# EAGLE board roulette wheel (EAGLE 9.6.0)
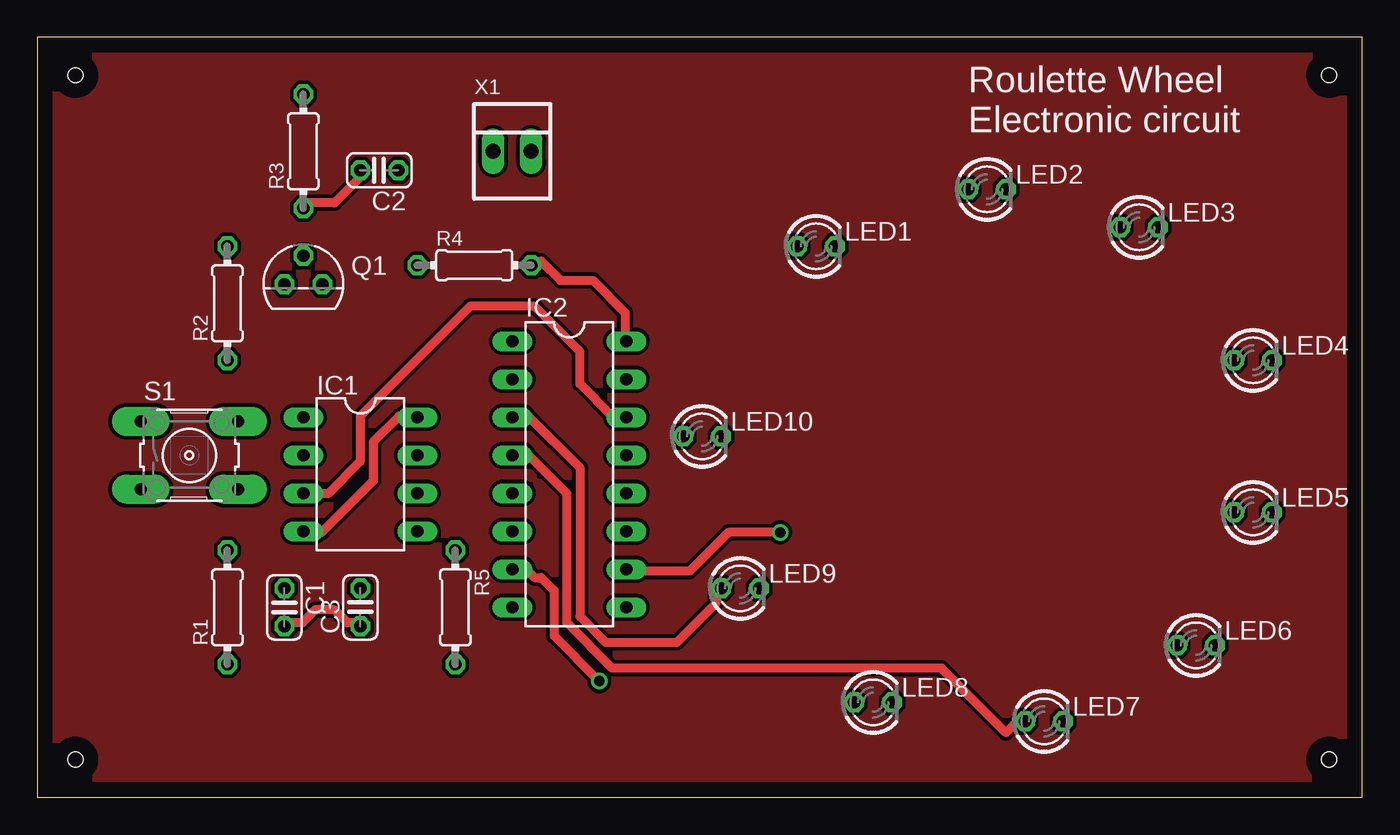
[diagram p0: board, top side]
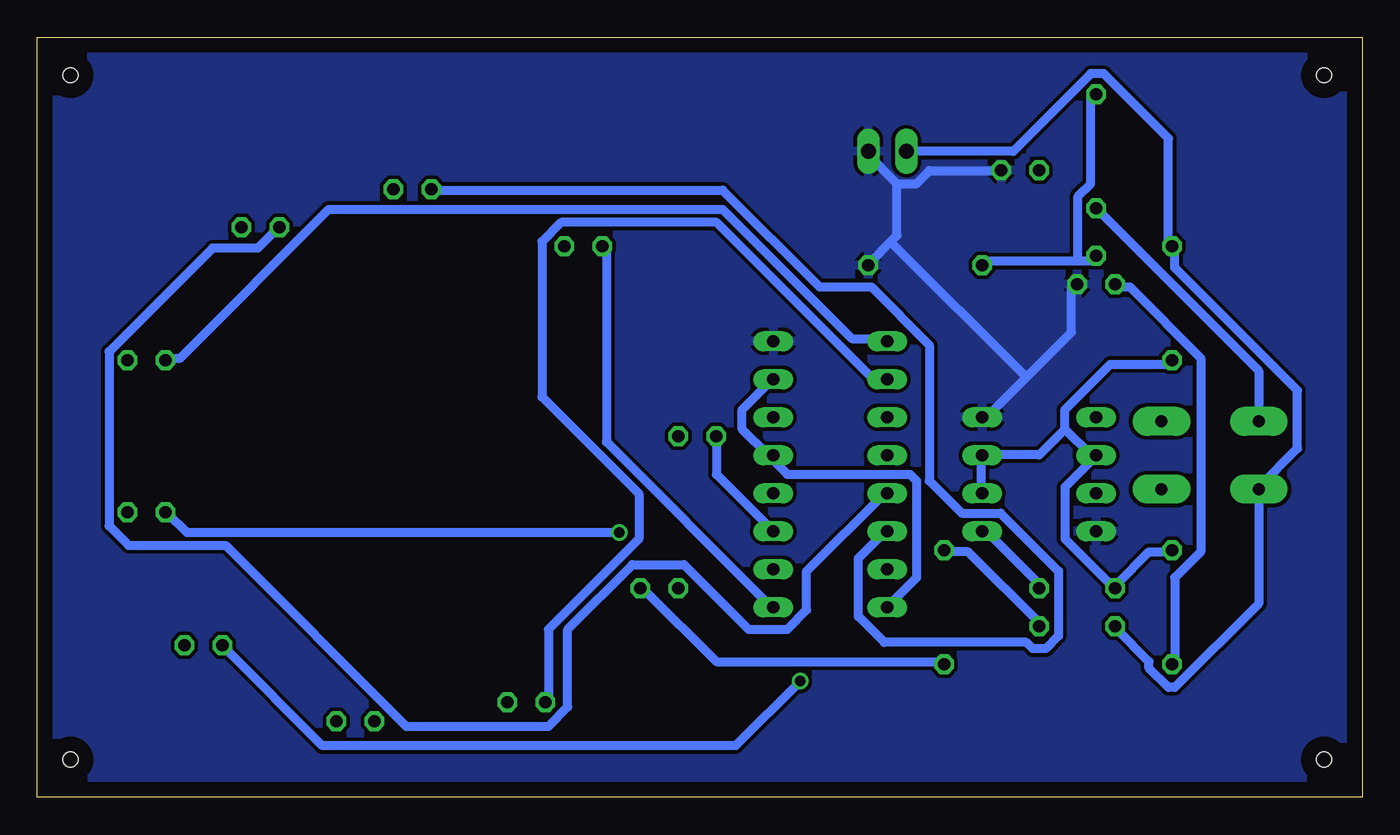
[diagram p1: board, bottom side, seen from below]

Size 88.57 x 50.79 mm. Coordinates in mm from the lower left corner, seen from the top.
Outline: 0,0 88.57,0 88.57,50.79 0,50.79 0,0
Copper layers (1*16): Top 0.035mm / dielectric 1.5mm / Bottom 0.035mm
Design rules "default": minimum track width 6mil, minimum drill 0.35mm, track to track 6mil, track to pad 6mil, pad to pad 6mil, via to via 6mil, smd to smd 6mil, copper to edge 40mil, drill to drill 6mil, minimum pad ring 10mil, minimum via ring 8mil, stop-mask expansion 4mil, vias tented up to drill 0mil, thermal gap 10mil
Net classes: 0 default: width 0.61 mm, drill 0.686 mm, clearance 0.254 mm
Holes 1 mm at 2.54,2.54 2.54,48.26 86.36,2.54 86.36,48.26

## Footprints (pad centres in the part's own frame; a part is rotated, then mirrored left to right if it is on the bottom)
C025-024X044 = drill 0.813 octagon: 1 -1.27,0; 2 1.27,0
DIL-08 = drill 0.813 long: 1 -3.81,-3.81; 2 -1.27,-3.81; 3 1.27,-3.81; 4 3.81,-3.81; 5 3.81,3.81; 6 1.27,3.81; 7 -1.27,3.81; 8 -3.81,3.81
DIL16 = drill 0.813 long: 1 -8.89,-3.81; 2 -6.35,-3.81; 3 -3.81,-3.81; 4 -1.27,-3.81; 5 1.27,-3.81; 6 3.81,-3.81; 7 6.35,-3.81; 8 8.89,-3.81; 9 8.89,3.81; 10 6.35,3.81; 11 3.81,3.81; 12 1.27,3.81; 13 -1.27,3.81; 14 -3.81,3.81; 15 -6.35,3.81; 16 -8.89,3.81
LED3MM = drill 0.813 octagon: A -1.27,0; K 1.27,0
TO92 = drill 0.813 octagon: 1 1.27,0; 2 0,1.905; 3 -1.27,0
0204/7 = drill 0.813 octagon: 1 -3.81,0; 2 3.81,0
B3F-10XX = drill 0.8 pad 1.93 long: 1 -3.251,2.261; 2 3.251,2.261; 3 -3.251,-2.261; 4 3.251,-2.261
22-23-2021 = drill 1 long: 1 -1.27,0; 2 1.27,0

## Placement (x,y rotation side)
C1  [C025-024X044]  16.51,12.7 270 top
C2  [C025-024X044]  22.86,41.91 180 top
C3  [C025-024X044]  21.59,12.7 90 top
IC1  NE555  [DIL-08]  21.59,21.59 270 top
IC2  4017N  [DIL16]  35.56,21.59 270 top
LED1  [LED3MM]  52.07,36.83 0 top
LED2  [LED3MM]  63.5,40.64 0 top
LED3  [LED3MM]  73.66,38.1 0 top
LED4  [LED3MM]  81.28,29.21 0 top
LED5  [LED3MM]  81.28,19.05 0 top
LED6  [LED3MM]  77.47,10.16 0 top
LED7  [LED3MM]  67.31,5.08 0 top
LED8  [LED3MM]  55.88,6.35 0 top
LED9  [LED3MM]  46.99,13.97 0 top
LED10  [LED3MM]  44.45,24.13 0 top
Q1  BC557  [TO92]  17.78,34.29 0 top
R1  [0204/7]  12.7,12.7 90 top
R2  [0204/7]  12.7,33.02 90 top
R3  [0204/7]  17.78,43.18 90 top
R4  [0204/7]  29.21,35.56 0 top
R5  [0204/7]  27.94,12.7 270 top
S1  [B3F-10XX]  10.16,22.86 0 top
X1  22-23-2021  [22-23-2021]  31.75,43.18 0 top

## Library data of the parts
C1-C3 = rcl; SPICEPREFIX: C
IC1 = st-microelectronics; MF: Arrow Electronics; MPN: NE555N; OC_FARNELL: 1467742; OC_NEWARK: 89K1486
IC2 = 40xx
LED1-LED10 = led
Q1 = transistor-pnp
R1-R5 = rcl; SPICEPREFIX: R
S1 = switch-omron; MPN: B3F-1000; OC_FARNELL: 176432; OC_NEWARK: 36M3542
X1 = con-molex; MF: MOLEX; MPN: 22-23-2021; OC_FARNELL: 1462926; OC_NEWARK: 25C3832

## Nets
N$1: C1.1 IC1.2 IC1.6 IC1.7 R1.2 R2.1
N$2: IC1.3 IC2.14
N$4: Q1.3 R1.1
N$5: Q1.2 R3.2 R4.1
N$6: C2.2 R3.1 S1.1
N$7: IC2.9 LED1.A
N$8: LED5.K
N$9: IC2.8 IC2.13 IC2.15
N$10: IC2.6 LED2.A
N$11: IC2.5 LED3.A
N$12: IC2.1 LED4.A
N$13: IC2.10 LED5.A
N$14: IC2.7 LED6.A
N$15: IC2.4 LED7.A
N$16: IC2.2 LED8.A
N$17: IC2.3 LED9.A
N$18: IC2.11 LED10.A
N$19: LED4.K
N$20: LED3.K
N$21: LED2.K
N$22: LED1.K
N$23: LED10.K
N$24: LED9.K R5.2
N$25: LED6.K
N$26: LED7.K
N$27: LED8.K
N$28: C1.2 C3.1 R2.2 R5.1 S1.3 X1.1
N$29: IC1.1
N$30: C3.2 IC1.5
VCC: C2.1 IC1.4 IC1.8 IC2.16 Q1.1 R4.2 X1.2

## Tracks (layer width: path | path; a pad name or v marks a point on that pad's centre or on a via)
GND
  pour Top: 0,50.8 0,0 88.9,0 88.9,50.8
N$1
  Bottom 0.61: R1.2 12.95,16.41 14.25,16.41 16.41,14.25 C1.1 16.84,14.25 19.86,17.27 19.86,20.73 18.14,22.45 IC1.2 18.14,22.89 19.86,24.61 | IC1.6 25.48,20.73 25.48,22.45 IC1.7 25.04,22.89 21.59,22.89 19.86,24.61 | 19.86,24.61 19.86,25.91 16.84,28.93 12.95,28.93 R2.1
N$2
  Top 0.61: IC1.3 18.14,20.3 19.43,20.3 21.59,22.45 21.59,25.48 28.93,32.82 33.25,32.82 36.27,29.79 36.27,27.64 38.43,25.48 39.29,25.48 IC2.14
N$4
  Bottom 0.61: R1.1 12.52,9.07 12.52,14.68 10.79,16.41 10.79,29.36 15.54,34.11 16.41,34.11 Q1.3
N$5
  Bottom 0.61: 19,35.84 18.14,35.84 Q1.2 | 19,35.84 25.04,35.84 R4.1 | 19,35.84 19,40.16 18.14,41.02 18.14,46.63 R3.2
N$6
  Top 0.61: C2.2 21.59,41.45 19.86,39.73 18.14,39.73 R3.1
  Bottom 0.61: S1.1 6.91,28.5 R3.1
N$7
  Bottom 0.61: IC2.9 39.73,12.95 50.52,23.75 50.52,36.7 LED1.A
N$9
  Bottom 0.61: IC2.8 31.52,12.95 29.79,14.68 29.79,21.16 30.23,21.59 38.43,21.59 39.29,22.45 IC2.13 39.73,22.89 41.45,24.61 41.45,25.91 39.73,27.64 IC2.15
N$10
  Bottom 0.61: IC2.6 31.95,17.7 33.68,15.98 33.68,12.09 31.95,10.36 22.45,10.36 22.02,9.93 21.16,9.93 20.3,10.79 20.3,15.11 24.18,19 26.77,19 28.93,21.16 28.93,30.23 32.82,34.11 36.27,34.11 42.75,40.59 62.18,40.59 LED2.A
N$11
  Bottom 0.61: IC2.5 31.95,20.3 37.13,15.11 37.13,12.52 38.43,11.23 41.02,11.23 45.34,15.54 48.79,15.54 53.11,11.23 53.11,6.04 54.41,4.75 63.91,4.75 76,16.84 82.47,16.84 83.77,18.14 83.77,29.79 76.86,36.7 73.84,36.7 72.54,38 LED3.A
N$12
  Bottom 0.61: IC2.1 31.95,30.66 34.11,30.66 42.75,39.29 69.09,39.29 79.02,29.36 79.88,29.36 LED4.A
N$13  (via drill 0.69)
  Top 0.61: v49.66,17.7 46.2,17.7 43.61,15.11 39.73,15.11 IC2.10
  Bottom 0.61: v49.66,17.7 78.59,17.7 79.88,19 LED5.A
N$14  (via drill 0.69)
  Top 0.61: v37.57,7.77 34.54,10.79 34.54,13.82 33.68,14.68 33.25,14.68 32.82,15.11 31.95,15.11 IC2.7
  Bottom 0.61: v37.57,7.77 41.88,3.45 69.52,3.45 76,9.93 LED6.A
N$15
  Top 0.61: IC2.4 31.95,22.89 32.82,22.89 35.41,20.3 35.41,11.66 38.43,8.64 60.45,8.64 64.77,4.32 65.63,5.18 LED7.A
N$16
  Bottom 0.61: LED8.A 54.41,6.48 54.41,11.23 48.36,17.27 48.36,20.3 54.84,26.77 54.84,37.13 53.54,38.43 43.18,38.43 32.82,28.07 31.95,28.07 IC2.2
N$17
  Top 0.61: LED9.A 45.34,13.82 45.34,12.95 42.75,10.36 38,10.36 36.27,12.09 36.27,22.02 32.82,25.48 31.95,25.48 IC2.3
N$18
  Bottom 0.61: IC2.11 43.18,21.59 LED10.A
N$24
  Bottom 0.61: R5.2 28.07,9.07 43.18,9.07 47.93,13.82 LED9.K
N$28
  Top 0.61: C1.2 16.84,11.66 17.7,11.66 18.57,12.52 19.86,12.52 20.73,11.66 21.59,11.66 C3.1
  Bottom 0.61: R5.1 27.64,16.41 26.34,16.41 21.59,11.66 C3.1 | X1.1 23.32,43.18 18.14,48.36 17.27,48.36 12.95,44.04 12.95,37.13 R2.2 12.52,36.7 12.52,35.41 4.32,27.2 4.32,23.32 6.91,20.73 S1.3 6.91,12.95 12.52,7.34 12.95,7.34 14.25,8.64 14.25,9.07 16.41,11.23 C1.2
N$30
  Bottom 0.61: C3.2 21.59,14.25 25.04,17.7 IC1.5
VCC
  Top 0.61: IC1.4 18.14,17.7 19,17.7 22.45,21.16 22.45,23.75 24.18,25.48 25.04,25.48 IC1.8 | IC2.16 39.29,30.66 39.29,32.38 37.13,34.54 34.98,34.54 33.68,35.84 33.25,35.84 R4.2
  Bottom 0.61: 22.45,28.07 25.04,25.48 IC1.8 | 22.45,28.07 19.43,31.09 19.43,34.11 Q1.1 | 31.09,41.02 29.79,41.02 28.93,41.88 24.18,41.88 C2.1 | 31.09,41.02 33.25,43.18 X1.2 | 31.09,41.02 31.09,37.57 31.52,37.13 | 31.52,37.13 32.82,35.84 R4.2 | 31.52,37.13 22.45,28.07
  pour Bottom: 0,50.8 0,0 88.9,0 88.9,50.8

## Text on the board
tPlace: Roulette Wheel / Electronic circuit